# Altium PCB DATN.PcbDoc
Units mm, origin at the board's own origin, x right, y up, seen from the top; angles counter-clockwise.
Board outline 52.75 x 57.83 mm, 2 copper layers (Top Layer, Bottom Layer); 3 components, 4 nets, 38 pads, 0 vias.
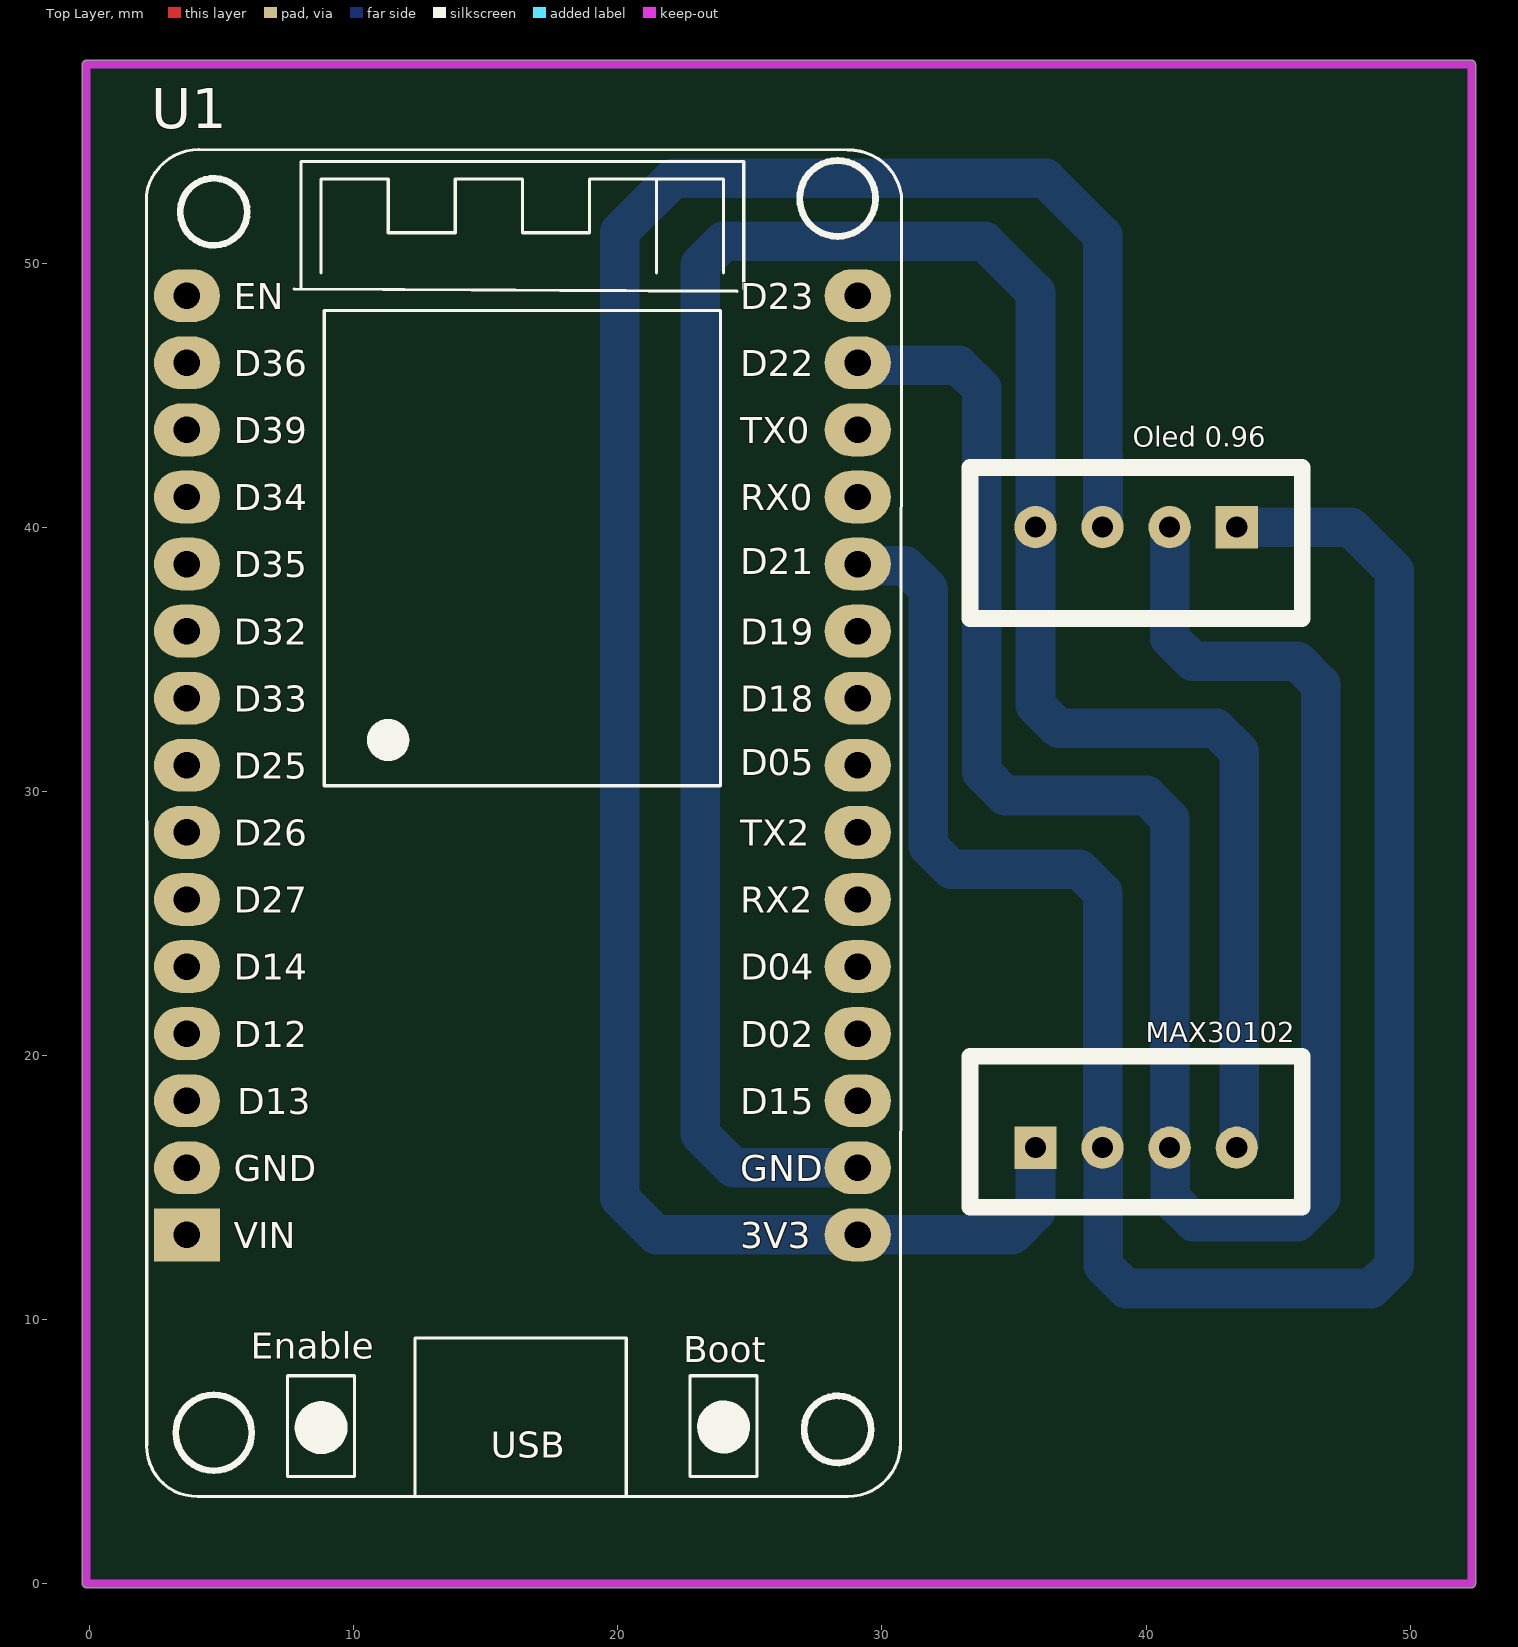
[diagram p0: Top Layer view]
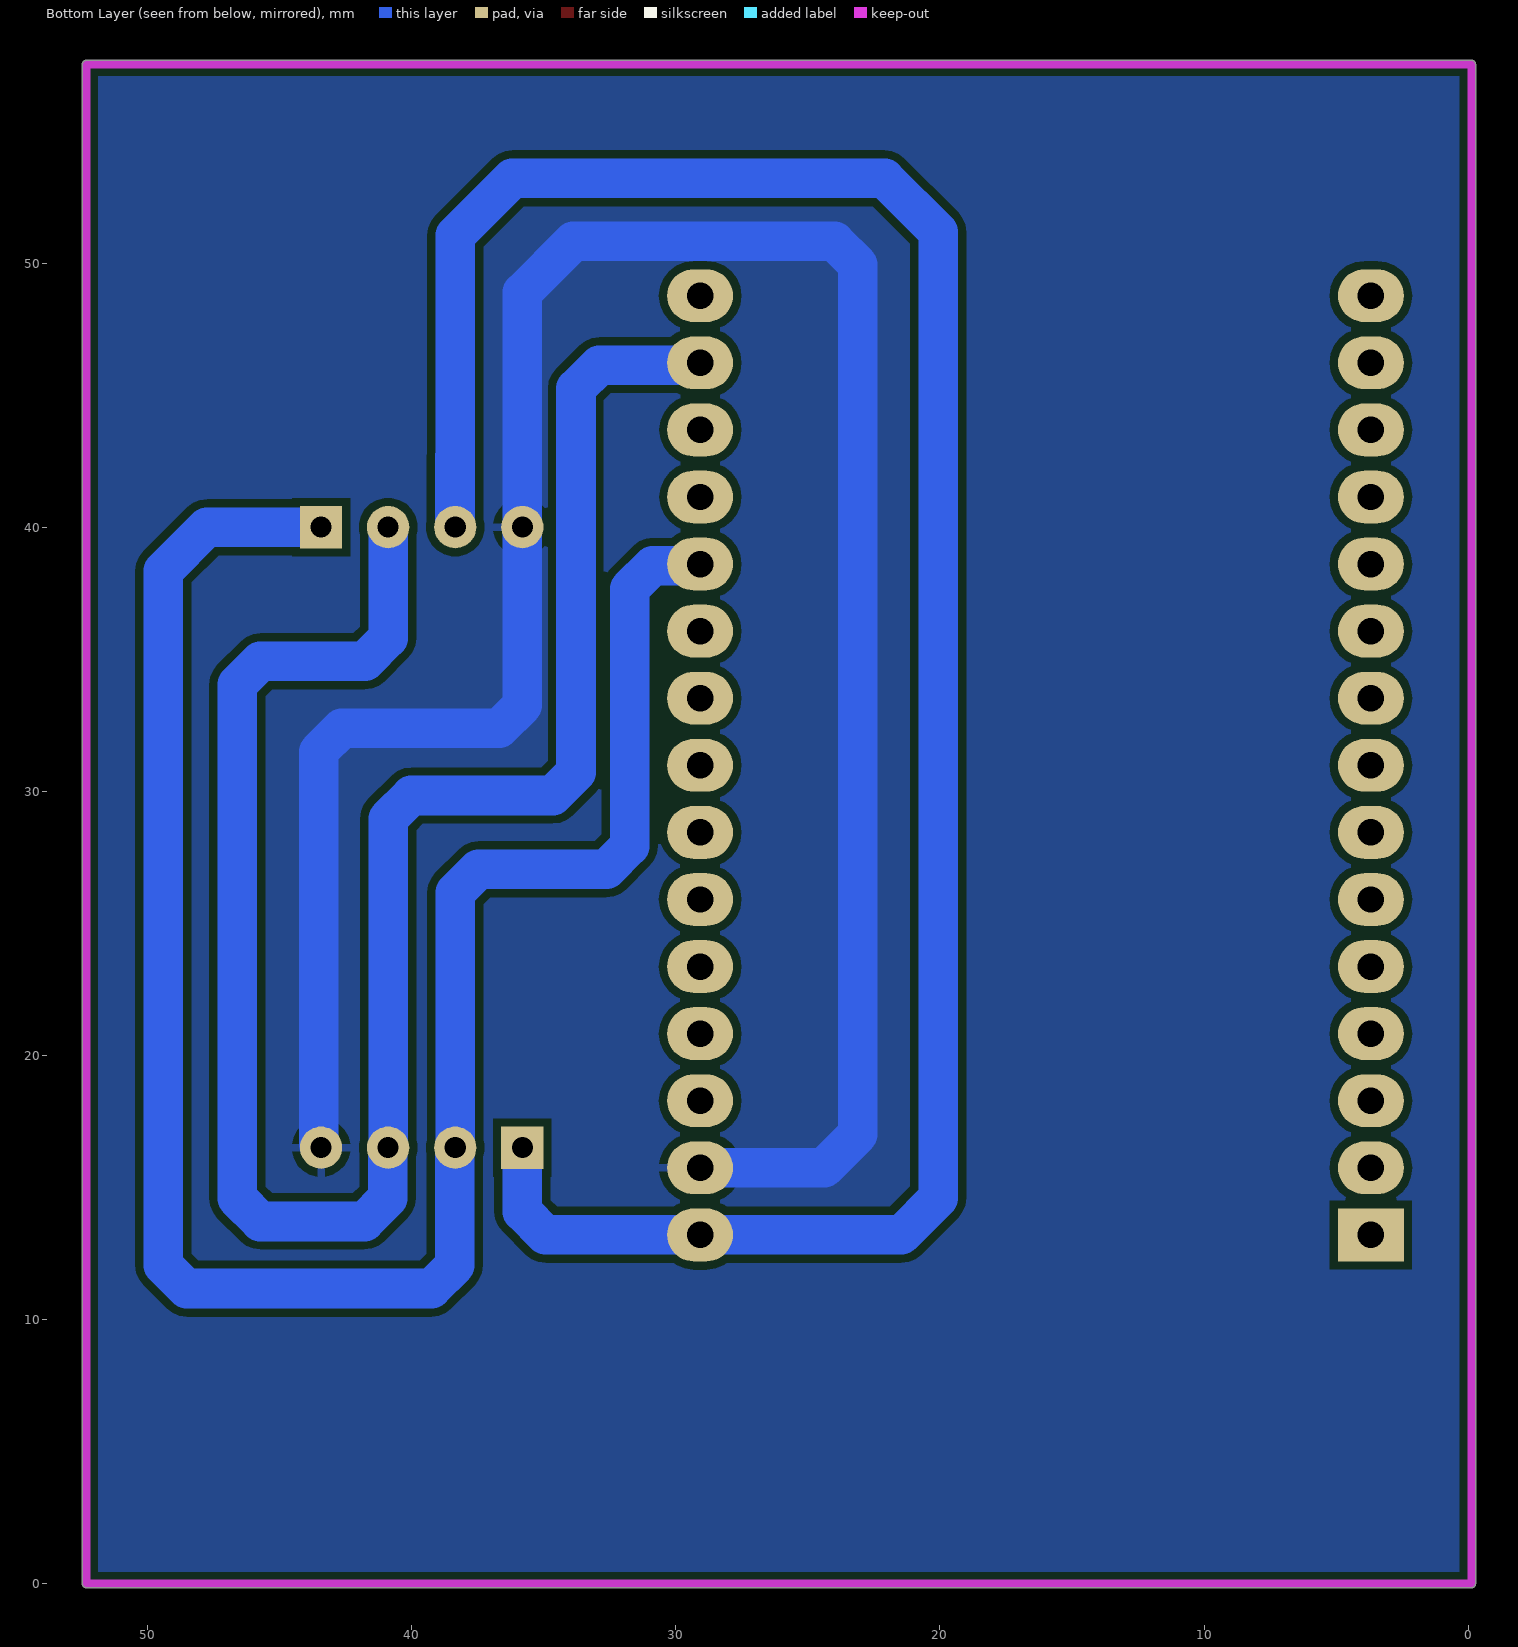
[diagram p1: Bottom Layer view, seen from below]
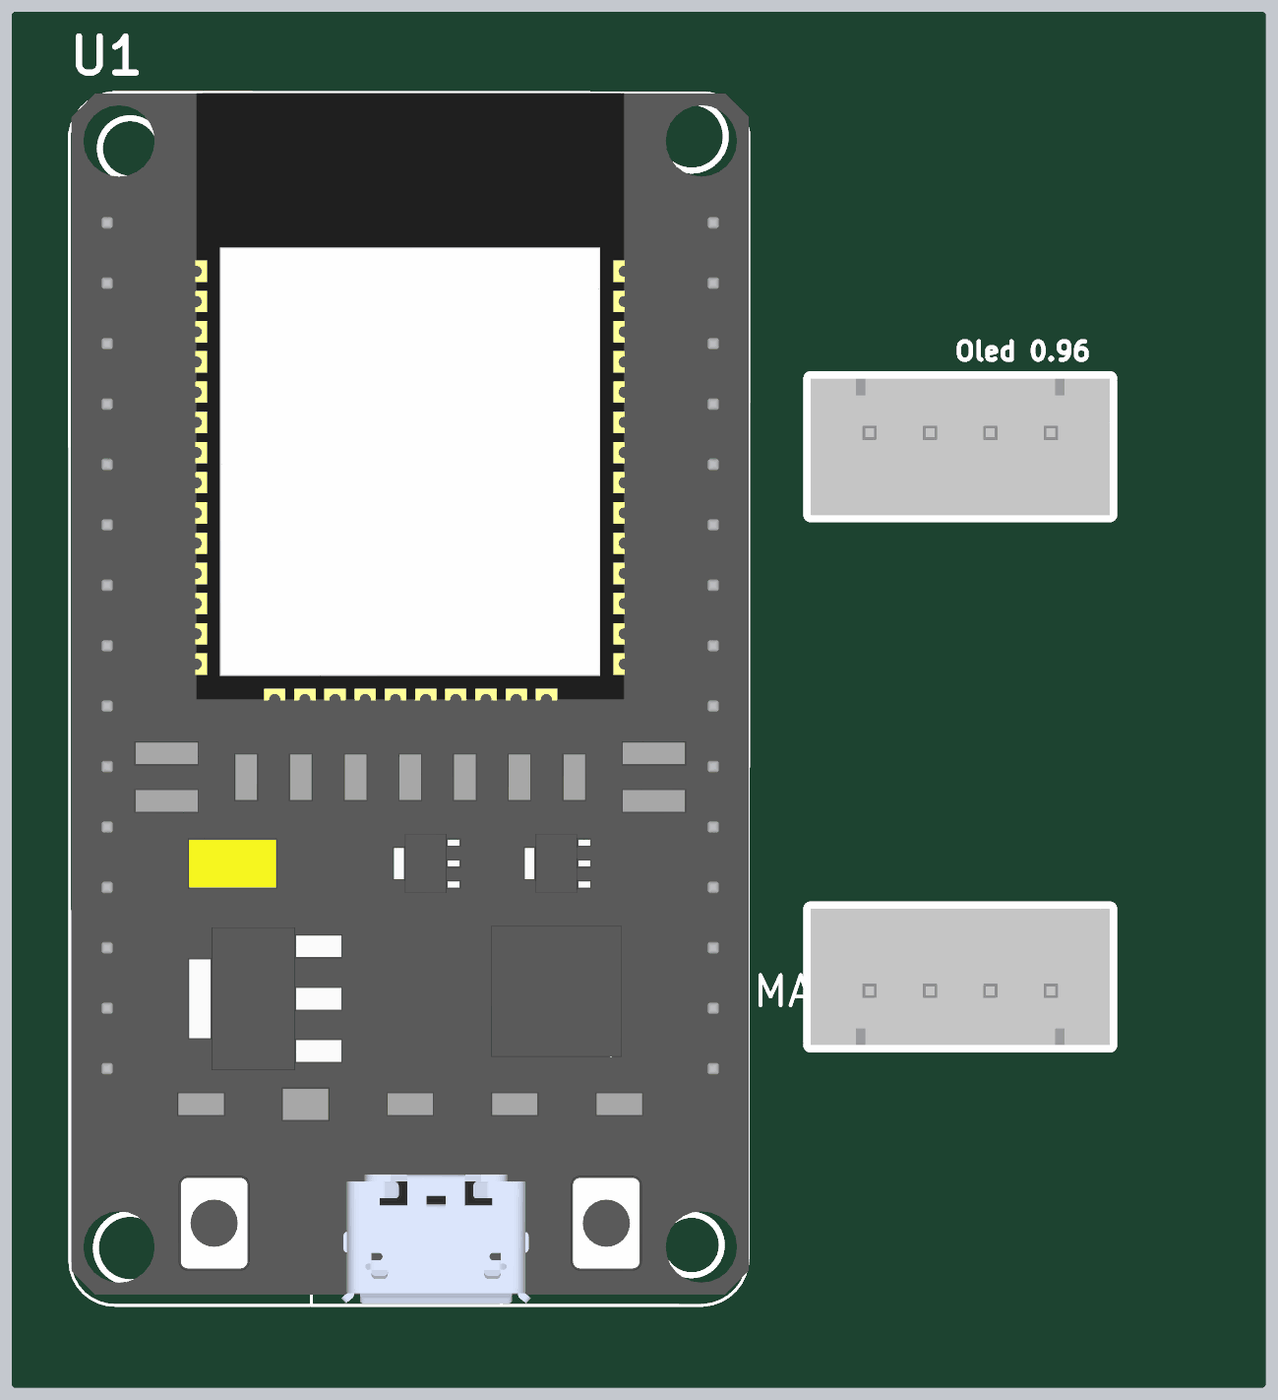
[diagram p2: 3D render of the assembled board from above, using the file's embedded part models]

## Layer stack, top to bottom
Top Solder: solder mask 0.0102, Solder Resist, Dk 3.5
Top Layer: signal copper 0.0356
Dielectric 1: dielectric 0.32, FR-4, Dk 4.8
Bottom Layer: signal copper 0.0356
Bottom Solder: solder mask 0.0102, Solder Resist, Dk 3.5

## Board outline
-0.277,0 ccw(c-0.127,0) -0.127,-0.15 52.324,-0.15 ccw(c52.324,0) 52.474,0 52.474,57.531 ccw(c52.324,57.531) 52.324,57.681 -0.127,57.681 ccw(c-0.127,57.531) -0.277,57.531

## Design rules (kind name [scope] priority, off if disabled: settings)
Clearance [All] p1: gap=0.3 ignorepadtopadclearanceinfootprint=FALSE
PolygonConnect [All] p1: connectstyle=Relief reliefconductorwidth=0.3 reliefentries=4 polygonreliefangle="90 Angle" airgapwidth=0.3
RoutingLayers [All] p1: top layer_v5=FALSE bottom layer_v5=TRUE
RoutingVias [All] p1: holewidth=0.711 width=1.27 viastyle="Through Hole" minholewidth=0.711 minwidth=1.27 maxholewidth=0.711 maxwidth=1.27
SolderMaskExpansion [All] p1: expansion=0.102 istentingtop=FALSE
Width [All] p1: maxlimit=2.5 minlimit=1 preferedwidth=1.5
29 further rules are at their usual default settings.

## Components (designator, comment, footprint, x,y, rotation, side; value= is the part's Value field where it differs from the comment)
MAX30102 "Header 4P 2.54 Duc Thang" XH2.54M-4 35.814,16.51 r0 top
"Oled 0.96" "Header 4P 2.54 Duc Thang" XH2.54M-4 43.434,40.005 r180 top
U1 "ESP32_30" ESP32_30 16.383,30.988 r0 top

## Footprints (in the part's own frame and the unit in brackets; to place one, negate y for a bottom-side part, rotate by r counter-clockwise, add the part's x,y. Pads: shape width x height; smd on the part's side, far side on the other; paste and mask are expansions set on the pad)
ESP32_30 [mm] "Microcontoller Board 30 Pins Wifi 2.4GHz BLE 4.2 ESP32-WROOM-32D"
  oval 2.5x2 hole 1: 1(-12.7,17.78) 2(-12.7,15.24) 3(-12.7,12.7) 4(-12.7,10.16) 5(-12.7,7.62) 6(-12.7,5.08) 7(-12.7,2.54) 8(-12.7,0) 9(-12.7,-2.54) 10(-12.7,-5.08) 11(-12.7,-7.62) 12(-12.7,-10.16) 13(-12.7,-12.7) 14(-12.7,-15.24) 16(12.7,17.78) 17(12.7,15.24) 18(12.7,12.7) 19(12.7,10.16) 20(12.7,7.62) 21(12.7,5.08) 22(12.7,2.54) 23(12.7,0) 24(12.7,-2.54) 25(12.7,-5.08) 26(12.7,-7.62) 27(12.7,-10.16) 28(12.7,-12.7) 29(12.7,-15.24) 30(12.7,-17.78)
  rect 2.5x2 hole 1: 15(-12.7,-17.78)
  silkscreen extent -14.23,-27.69 14.35,23.31, body extent -14.15,-27.61 14.35,23.29, height 7
XH2.54M-4 [mm]
  rect 1.6x1.6 hole 0.8: 1(0,0)
  round 1.6 hole 0.8: 2(2.54,0) 3(5.08,0) 4(7.62,0)
  silkscreen extent -2.48,-2.26 10.1,3.46, body extent -2.48,-2.26 10.1,3.48, height 6.91

## Part data
MAX30102 "Oled 0.96": "Cắm", Chung_Loai=Cắm, Don_Vi=Con, Ma_Hang=MH001285, Ten_Linh_Kien="Header 4P XH2.54-4P Đực Thẳng"
U1: "Microcontoller Board 30 Pins Wifi 2.4GHz BLE 4.2 ESP32-WROOM-32D", ComponentLink1Description=Datasheet, ComponentLink1URL=https://www.mouser.com/datasheet/2/891/esp32_wroom_32d_esp32_wroom_32u_datasheet_en-1365844.pdf

## Nets (pads, with @x,y where several pads share a name; then routed paths per layer and width w, separated by ;. In a path a pad name is that pad's centre, name@x,y a point inside that pad or via, vN(x,y) a via of type N, cw(c..) or ccw(c..) an arc to the next point about the centre after c; other vN are vias at no path point)
3V3: "Oled 0.96.3" MAX30102.1 U1.30 | length 89.5
  Bottom Layer w1.5: MAX30102.1 35.814,14.087 34.935,13.208 21.463,13.208 20.066,14.605 20.066,51.181 22.098,53.213 36.195,53.213 38.354,51.054 38.354,40.005 38.373,40.024 38.373,42.691
GND: "Oled 0.96.4" MAX30102.4 U1.29 | length 92.4
  Bottom Layer w1.5: U1.29 24.384,15.748 23.114,17.018 23.114,49.947 23.993,50.825 33.884,50.825 35.814,48.895 35.814,40.005 35.814,33.264 36.693,32.385 42.651,32.385 43.529,31.506 43.529,16.632 43.434,16.537 MAX30102.4
SCL: "Oled 0.96.2" MAX30102.3 U1.17 | length 78.4
  Bottom Layer w1.5: U1.17 29.179,46.132 32.903,46.132 33.782,45.254 33.782,30.724 34.661,29.845 40.015,29.845 40.894,28.966 MAX30102.3 40.913,16.491 40.913,14.595 41.792,13.716 45.73,13.716 46.609,14.595 46.609,34.046 45.73,34.925 41.773,34.925 40.894,35.804 40.894,40.005
SDA: "Oled 0.96.1" MAX30102.2 U1.20 | length 79
  Bottom Layer w1.5: U1.20 29.141,38.55 30.871,38.55 31.75,37.671 31.75,27.93 32.629,27.051 37.475,27.051 38.354,26.172 MAX30102.2 38.373,16.491 38.373,12.055 39.252,11.176 48.524,11.176 49.403,12.055 49.403,38.354 47.752,40.005 43.434,40.005
pads on no net: U1.1 U1.2 U1.3 U1.4 U1.5 U1.6 U1.7 U1.8 U1.9 U1.10 U1.11 U1.12 U1.13 U1.14 U1.15 U1.16 U1.18 U1.19 U1.21 U1.22 U1.23 U1.24 U1.25 U1.26 U1.27 U1.28

## Polygon pours and split planes (outlines as drawn)
GND on Bottom Layer "NONET_L-01_P-001" (solid, pour order 0): -0.127,57.531 52.324,57.531 52.324,0 52.318,0.006 -0.12,0.006

## Keep-outs
Keep-Out Layer:
  lines w0.3: -0.127,0 -0.127,57.531 52.324,57.531 52.324,0 -0.127,0

## Text inside footprints (layer, text, board x,y; h text height)
U1: Top Overlay "RX0" at 24.638,40.64 h1; Top Overlay "TX0" at 24.638,43.18 h1; Top Overlay "D22" at 24.638,45.72 h1; Top Overlay "D21" at 24.638,38.227 h1; Top Overlay "D18" at 24.638,33.02 h1; Top Overlay "D05" at 24.638,30.607 h1; Top Overlay "D19" at 24.638,35.56 h1; Top Overlay "D25" at 5.461,30.48 h1; Top Overlay "D33" at 5.461,33.02 h1; Top Overlay "D35" at 5.461,38.1 h1; Top Overlay "D34" at 5.461,40.64 h1; Top Overlay "D32" at 5.461,35.56 h1; Top Overlay "D26" at 5.461,27.94 h1; Top Overlay "D13" at 5.588,17.78 h1; Top Overlay "D27" at 5.461,25.4 h1; Top Overlay "D14" at 5.461,22.86 h1; Top Overlay "GND" at 5.461,15.24 h1; Top Overlay "VIN" at 5.461,12.7 h1; Top Overlay "D12" at 5.461,20.32 h1; Top Overlay "D39" at 5.461,43.18 h1; Top Overlay "3V3" at 24.638,12.7 h1; Top Overlay "D04" at 24.638,22.86 h1; Top Overlay "GND" at 24.638,15.24 h1; Top Overlay "D02" at 24.638,20.32 h1; Top Overlay "D15" at 24.638,17.78 h1; Top Overlay "RX2" at 24.638,25.4 h1; Top Overlay "TX2" at 24.638,27.94 h1; Top Overlay "D36" at 5.461,45.72 h1; Top Overlay "D23" at 24.638,48.26 h1; Top Overlay "EN" at 5.461,48.26 h1; Top Overlay "USB" at 15.183,4.778 h1; Top Overlay "Boot" at 22.479,8.382 h1; Top Overlay "Enable" at 6.096,8.509 h1